# Altium PCB ButtonPCB.PcbDoc
Units mm, origin at the board's own origin, x right, y up, seen from the top; angles counter-clockwise.
Board outline 41.02 x 35.81 mm, 2 copper layers (Top Layer, Bottom Layer); 8 components, 16 nets, 32 pads, 4 vias.
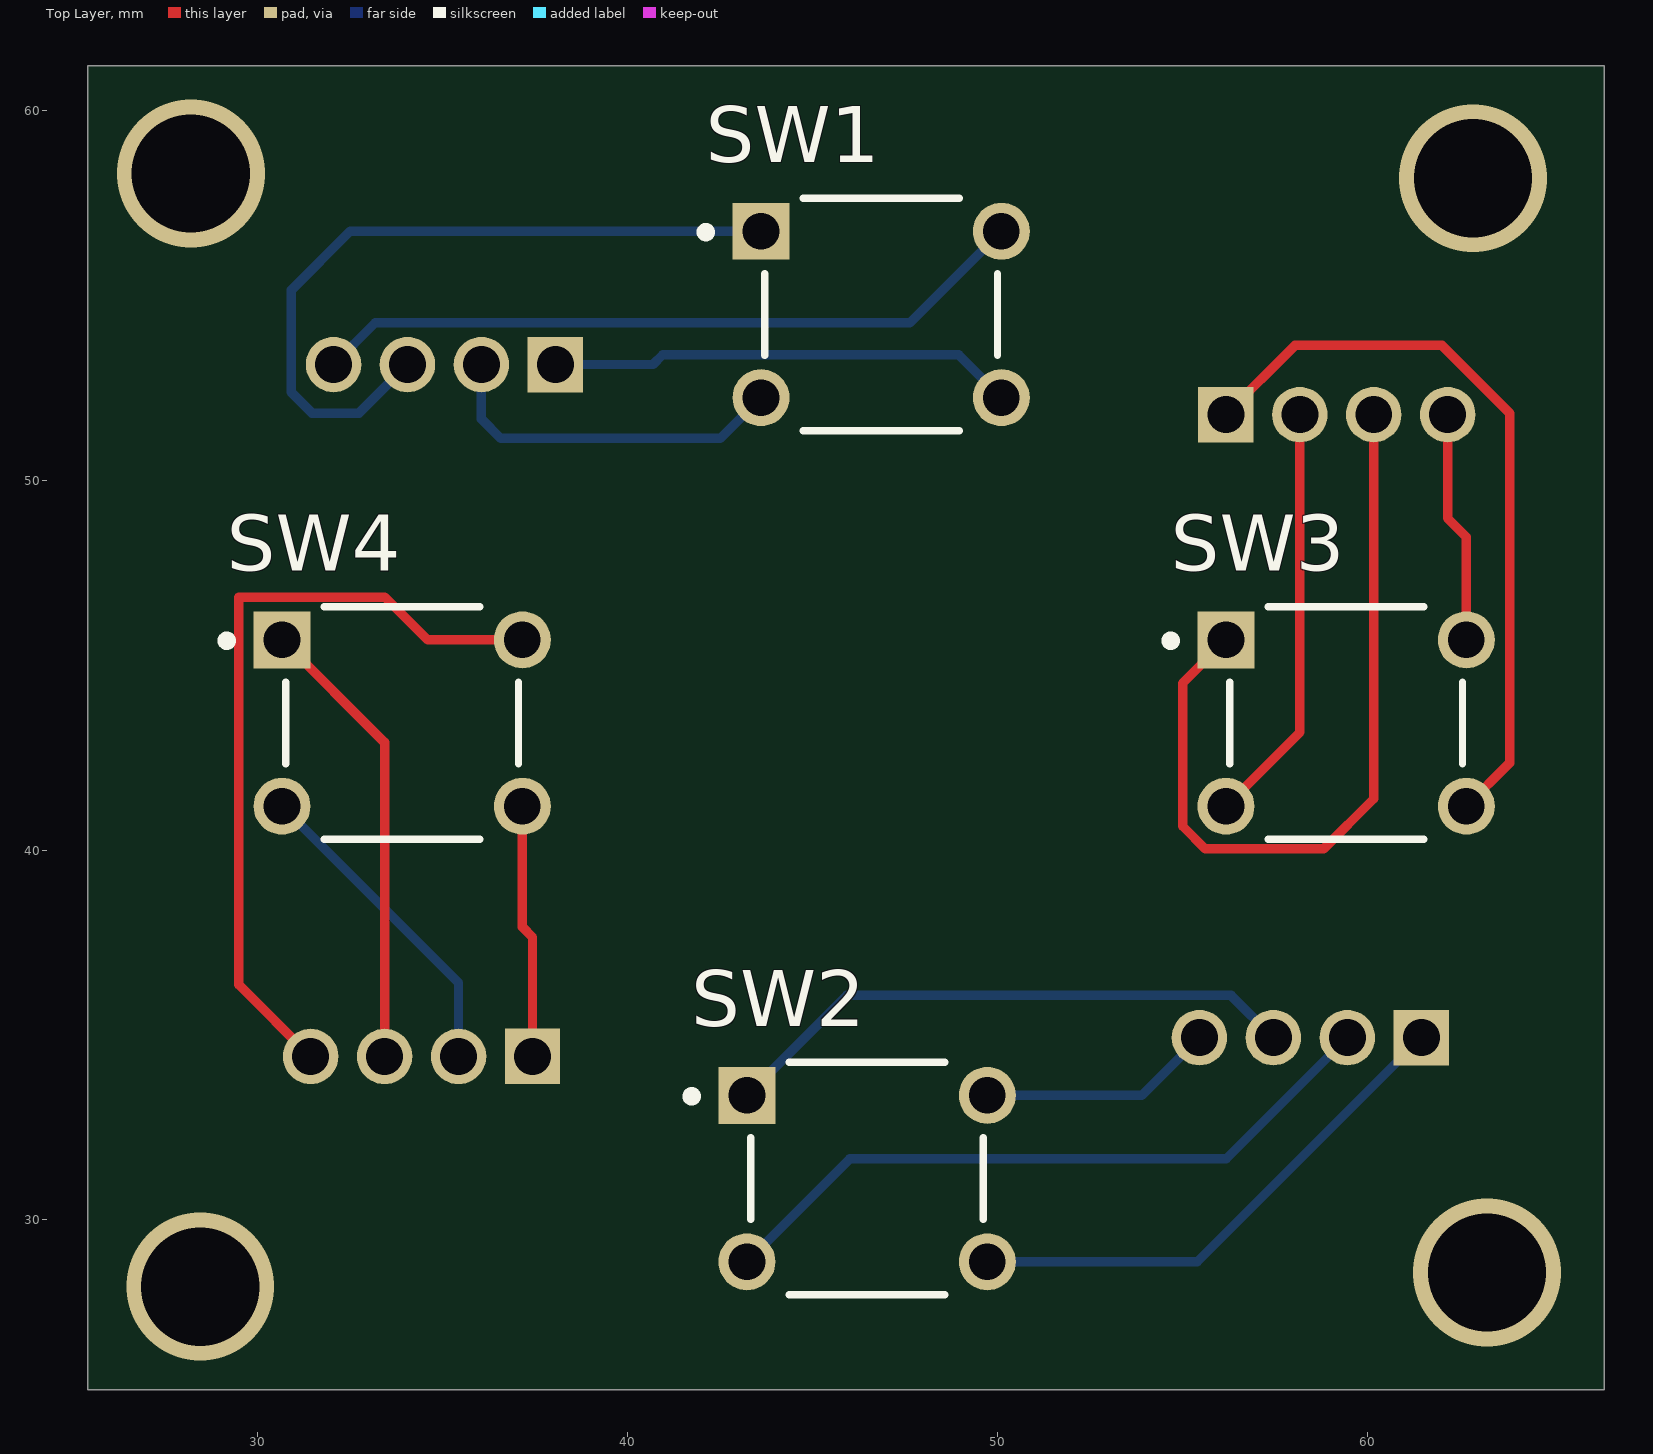
[diagram p0: Top Layer view]
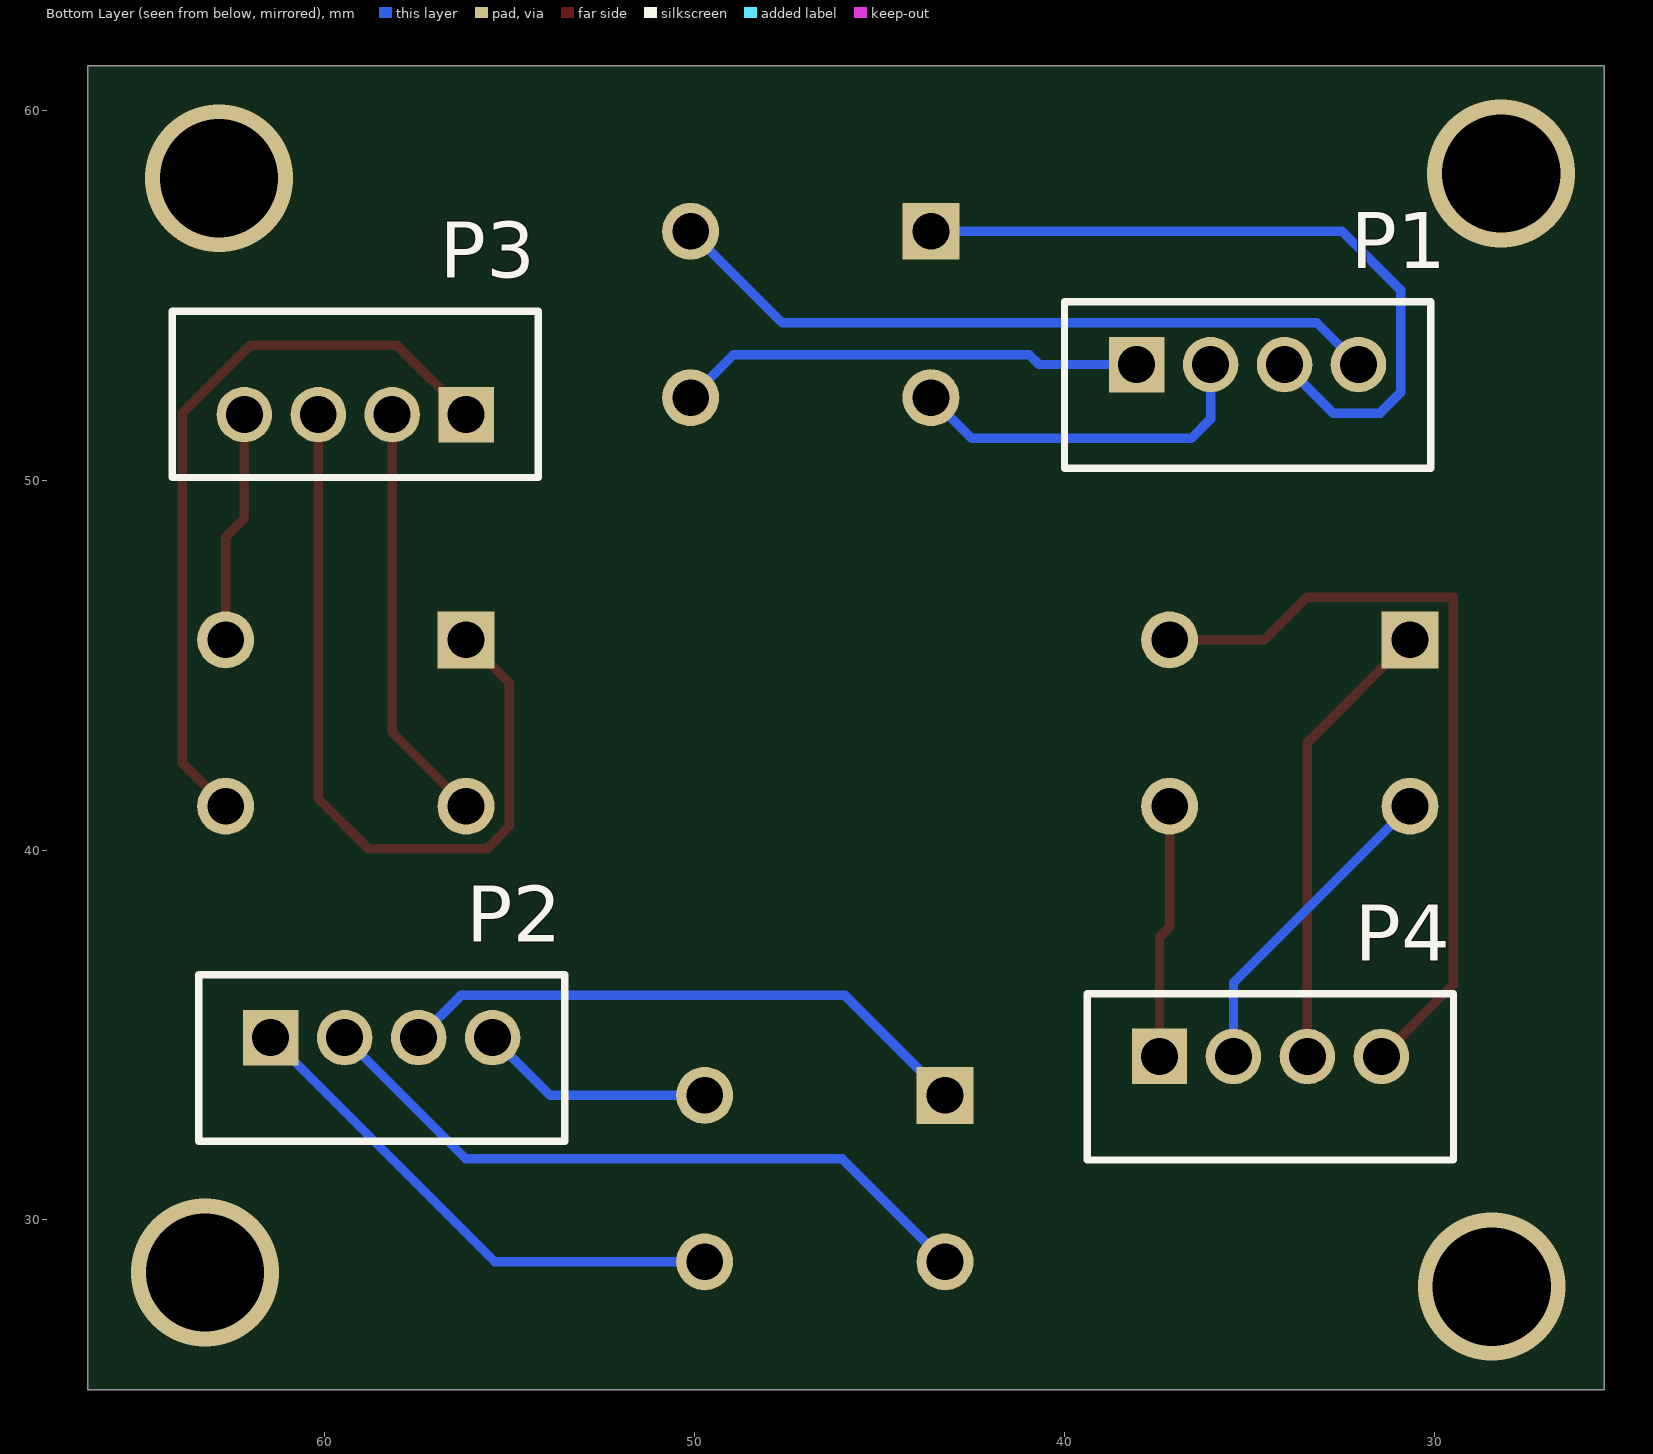
[diagram p1: Bottom Layer view, seen from below]
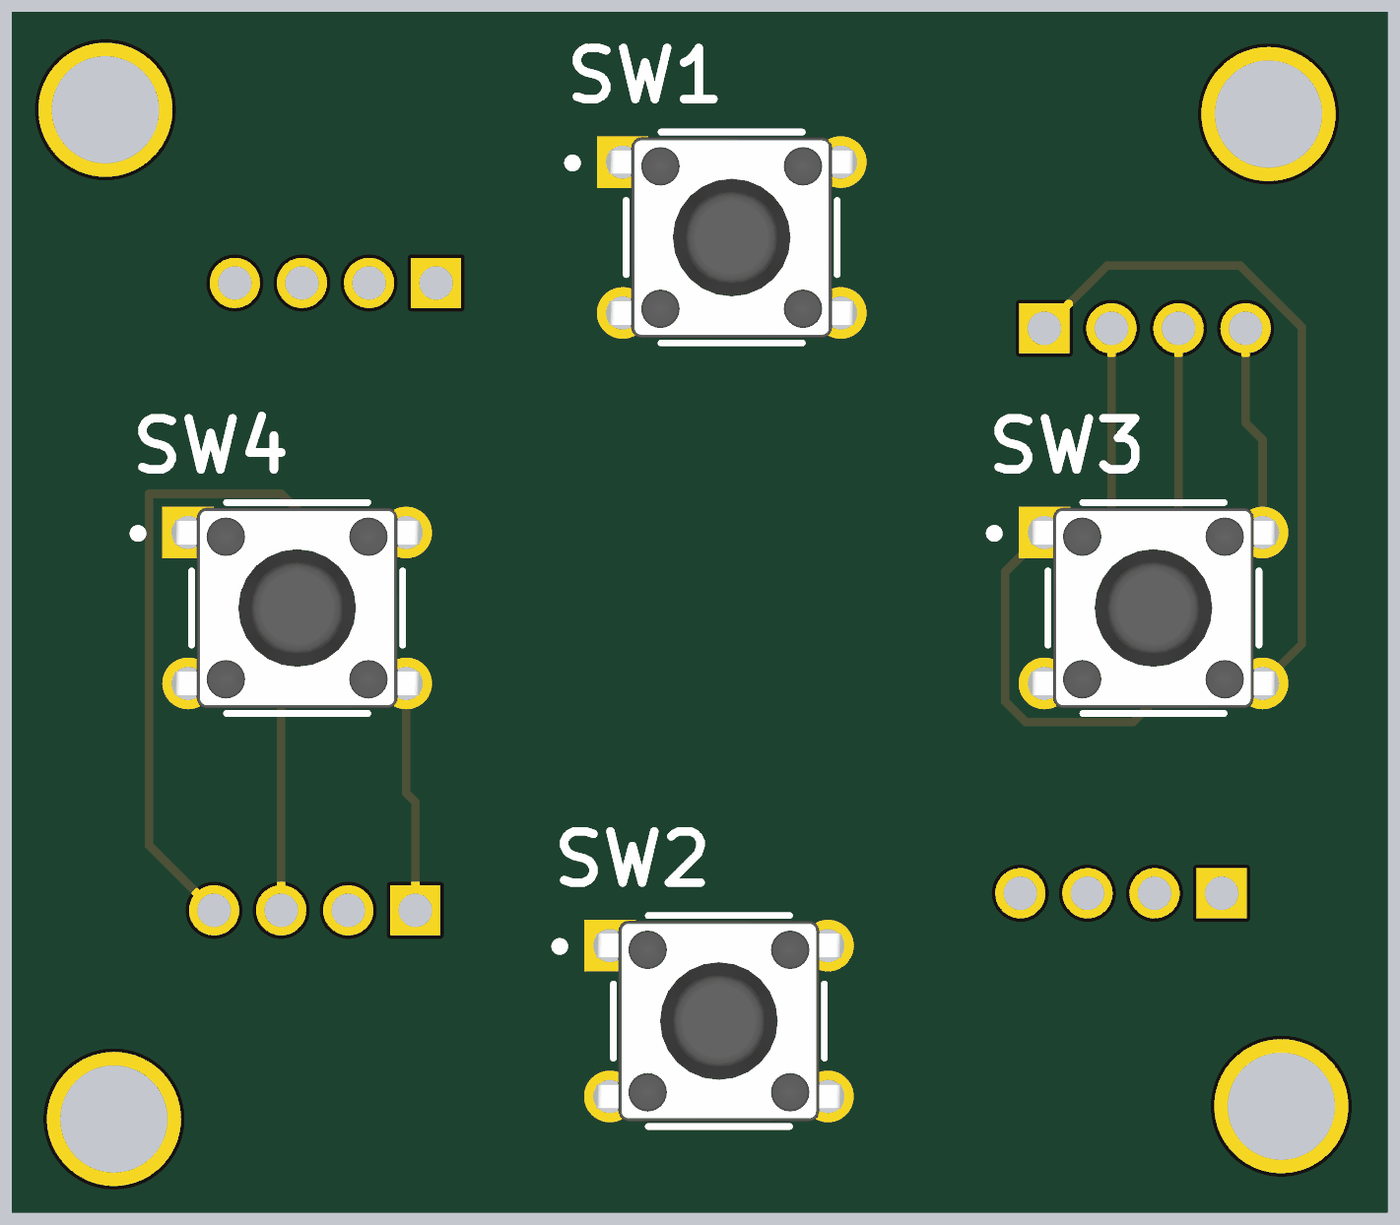
[diagram p2: 3D render of the assembled board from above, using the file's embedded part models]

## Layer stack, top to bottom
Top Solder: solder mask 0.0102, Solder Resist, Dk 3.5
Top Layer: signal copper 0.0356
Dielectric 1: dielectric 0.32, FR-4, Dk 4.8
Bottom Layer: signal copper 0.0356
Bottom Solder: solder mask 0.0102, Solder Resist, Dk 3.5

## Board outline
25.4,25.4 66.421,25.4 66.421,61.214 25.4,61.214

## Design rules (kind name [scope] priority, off if disabled: settings)
Clearance [All] p1: gap=0.254 ignorepadtopadclearanceinfootprint=FALSE
PolygonConnect [All] p1: connectstyle=Relief reliefconductorwidth=0.254 reliefentries=4 polygonreliefangle="90 Angle" airgapwidth=0.254
RoutingVias [All] p1: holewidth=0.711 width=1.27 viastyle="Through Hole" minholewidth=0.711 minwidth=1.27 maxholewidth=0.711 maxwidth=1.27
SolderMaskExpansion [All] p1: expansion=0.102 istentingtop=FALSE
Width [All] p1: maxlimit=0.254 minlimit=0.254 preferedwidth=0.254
30 further rules are at their usual default settings.

## Components (designator, comment, footprint, x,y, rotation, side; value= is the part's Value field where it differs from the comment)
P1 "B4B-PH-K-S(LF)(SN)" JST-B4B-PH-K-S_V 35.052,52.578 r180 bottom
P2 "B4B-PH-K-S(LF)(SN)" JST-B4B-PH-K-S_V 58.468,34.375 r180 bottom
P3 "B4B-PH-K-S(LF)(SN)" JST-B4B-PH-K-S_V 59.182,52.324 r0 bottom
P4 "B4B-PH-K-S(LF)(SN)" JST-B4B-PH-K-S_V 34.433,33.867 r180 bottom
SW1 "3-1825910-1" FP-3-1825910-1-MFG 46.863,54.483 r0 top
SW2 "3-1825910-1" FP-3-1825910-1-MFG 46.482,31.115 r0 top
SW3 "3-1825910-1" FP-3-1825910-1-MFG 59.436,43.434 r0 top
SW4 "3-1825910-1" FP-3-1825910-1-MFG 33.909,43.434 r0 top

## Footprints (in the part's own frame and the unit in brackets; to place one, negate y for a bottom-side part, rotate by r counter-clockwise, add the part's x,y. Pads: shape width x height; smd on the part's side, far side on the other; paste and mask are expansions set on the pad)
FP-3-1825910-1-MFG [mm]
  rect 1.54x1.54 hole 0.99 paste-2539.97 mask+0: 1(-3.25,2.25)
  round 1.54 hole 0.99 paste-2539.97 mask+0: 2(3.25,2.25) 3(-3.25,-2.25) 4(3.25,-2.25)
  silkscreen extent -4.87,-3.14 3.14,3.14, body extent -4.12,-3.24 4.12,3.24, height 0.25
JST-B4B-PH-K-S_V [mm] "Connector, 4-Leads, Body 9.9x4.5mm, Pitch 2mm"
  rect 1.5x1.5 hole 1: 1(-3,0.55)
  round 1.5 hole 1: 2(-1,0.55) 3(1,0.55) 4(3,0.55)
  silkscreen extent -4.95,-2.25 4.95,2.25, body extent -4.95,-2.25 4.95,2.25, height 6

## Part data
P1 P2 P3 P4: library part CMP-2000-05165-1, "Male Header, Pitch 2 mm, 1 x 4 Position, Height 6 mm, Tail Length 3.4 mm, -25 to 85 degC, RoHS, Bulk", Manufacturer=JST, Datasheet URL=http://datasheet.octopart.com/B4B-PH-K-S%28LF%29%28SN%29-JST-datasheet-10558886.pdf, Datasheet Version=Apr-09, Manufacturer URL=http://www.jst.com/home2.html, No of Positions=4, Pitch=2mm, Style/Orientation=StraightHeader/Plug, Termination=Crimp, Type=ShroudedHeader
SW1 SW2 SW3 SW4: library part CMP-03407-000001-1, "SWITCH TACTILE SPST-NO 0.05A 24V", Contact Current Rating=50mA, Contact Resistance=100mΩ, Manufacturer="TE Connectivity", Operating Force=160gf, Package=0, Temperature="-35°C to +85°C", Temperature Range High=+85°C, Temperature Range Low=-35°C, Automotive=No, Category=Switch, ComponentLink2Description=Datasheet, ComponentLink2URL=https://www.te.com/commerce/DocumentDelivery/DDEController?Action=srchrtrv&DocNm=1825910&DocType=Customer+Drawing&DocLang=English, Device Class L1=Electromechanical, Device Class L2=Switches, Device Class L3="Tactile Switches", Digikey Description="SWITCH TACTILE SPST-NO 0.05A 24V", Electromechanical Life=100000Cycles, Height=17.3mm, Lead Free=Yes, Manufacturer Part Number=3-1825910-1, Mount="Through Hole", Octopart=https://octopart.com/3-1825910-1-te+connectivity-46506874, RoHS=TRUE, Throw Configuration=SPST-NO

## Via types
v1: diameter 4, hole 3.2, Top Layer to Bottom Layer, 4 vias

## Nets (pads, with @x,y where several pads share a name; then routed paths per layer and width w, separated by ;. In a path a pad name is that pad's centre, name@x,y a point inside that pad or via, vN(x,y) a via of type N, cw(c..) or ccw(c..) an arc to the next point about the centre after c; other vN are vias at no path point)
NetP1_1: P1.1 SW1.4 | length 12.6
  Bottom Layer w0.254: P1.1 40.691,53.128 40.954,53.391 48.955,53.391 SW1.4
NetP1_2: P1.2 SW1.3 | length 9.7
  Bottom Layer w0.254: P1.2 36.052,51.654 36.576,51.13 42.51,51.13 SW1.3
NetP1_3: P1.3 SW1.1 | length 20
  Bottom Layer w0.254: P1.3 32.74,51.816 31.47,51.816 30.912,52.374 30.912,55.143 32.501,56.733 SW1.1
NetP1_4: P1.4 SW1.2 | length 19.6
  Bottom Layer w0.254: P1.4 33.183,54.259 47.639,54.259 SW1.2
NetP2_1: P2.1 SW2.4 | length 14.2
  Bottom Layer w0.254: SW2.4 55.408,28.865 P2.1
NetP2_2: P2.2 SW2.3 | length 18.7
  Bottom Layer w0.254: SW2.3 46.015,31.648 56.191,31.648 P2.2
NetP2_3: P2.3 SW2.1 | length 15.8
  Bottom Layer w0.254: SW2.1 45.935,36.068 56.325,36.068 P2.3
NetP2_4: P2.4 SW2.2 | length 6.4
  Bottom Layer w0.254: SW2.2 53.908,33.365 P2.4
NetP3_1: P3.1 SW3.4 | length 20.3
  Top Layer w0.254: P3.1 58.053,53.645 62.027,53.645 63.856,51.816 63.856,42.354 SW3.4
NetP3_2: P3.2 SW3.3 | length 11.4
  Top Layer w0.254: SW3.3 58.182,43.18 P3.2
NetP3_3: P3.3 SW3.1 | length 21.9
  Top Layer w0.254: SW3.1 55.016,44.514 55.016,40.64 55.626,40.03 58.826,40.03 60.182,41.386 P3.3
NetP3_4: P3.4 SW3.2 | length 6.3
  Top Layer w0.254: P3.4 62.182,48.967 62.686,48.463 SW3.2
NetP4_1: P4.1 SW4.4 | length 6.9
  Top Layer w0.254: SW4.4 37.159,37.917 37.433,37.643 P4.1
NetP4_2: P4.2 SW4.3 | length 8.7
  Bottom Layer w0.254: SW4.3 35.433,36.41 P4.2
NetP4_3: P4.3 SW4.1 | length 12.4
  Top Layer w0.254: SW4.1 33.433,42.91 P4.3
NetP4_4: P4.4 SW4.2 | length 21.4
  Top Layer w0.254: P4.4 29.489,36.361 29.489,46.838 33.441,46.838 34.595,45.684 SW4.2
copper on no net:
  other v1: 28.448,28.194 63.246,28.575 62.865,58.166 28.194,58.293